# EAGLE board memcard (EAGLE 9.6.2)
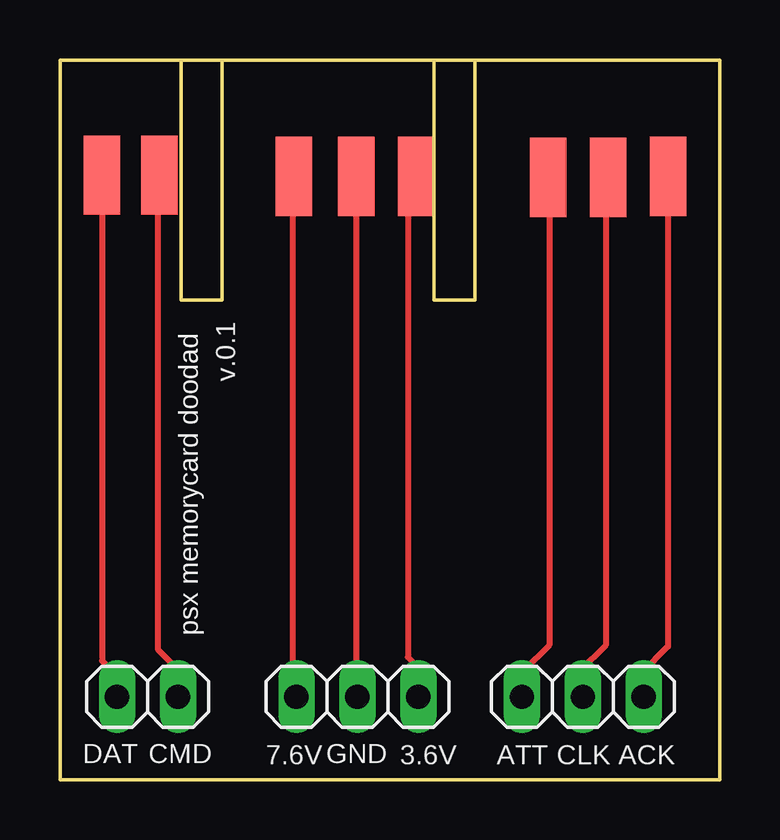
[diagram p0: board, top side]
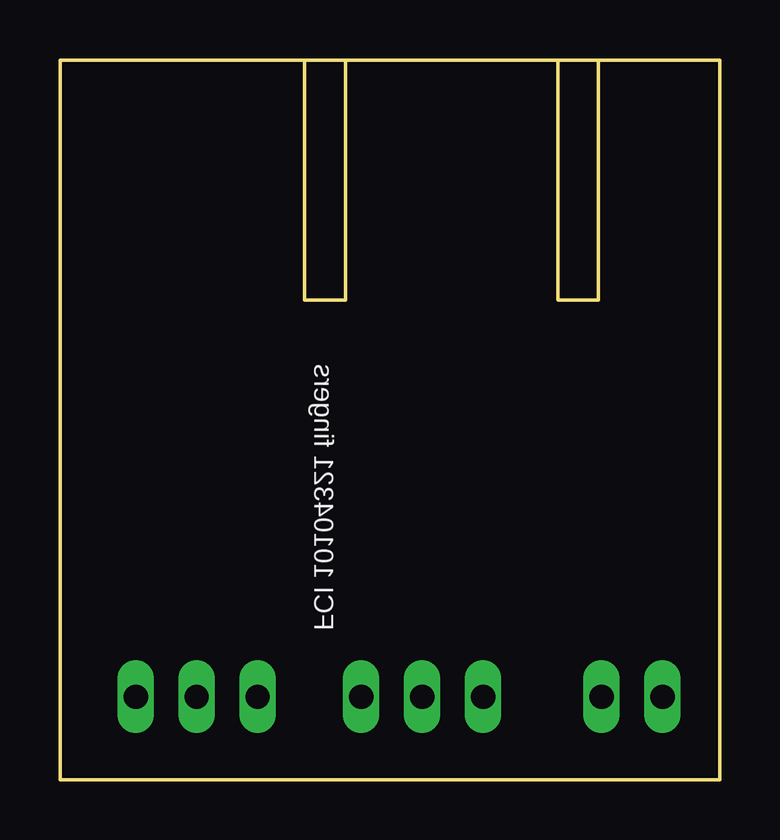
[diagram p1: board, bottom side, seen from below]

Size 27.5 x 30 mm. Coordinates in mm from the lower left corner, seen from the top.
Outline: 5.05,30 0,30 0,0 27.5,0 27.5,30 17.3,30
Outline: 5.05,30 6.75,30
Outline: 6.75,30 15.6,30
Outline: 15.6,30 17.3,30
Outline: 5.05,30 5.05,20 6.75,20 6.75,30
Outline: 15.6,30 15.6,20 17.3,20 17.3,30
Copper layers (1*16): Top 0.035559375mm / dielectric 1.6mm / Bottom 0.035559375mm
Design rules "oshpark-2layer": minimum track width 6mil, minimum drill 10mil, track to track 6mil, track to pad 6mil, pad to pad 6mil, via to via 6mil, smd to smd 6mil, copper to edge 15mil, drill to drill 6mil, minimum pad ring 5mil, minimum via ring 5mil, stop-mask expansion 2.5mil, vias tented up to drill 0mil, thermal gap 10mil

## Footprints (pad centres in the part's own frame; a part is rotated, then mirrored left to right if it is on the bottom)
1X02 = drill 1.016 long: 1 -1.27,0; 2 1.27,0
1X03 = drill 1.016 long: 1 -2.54,0; 2 0,0; 3 2.54,0
MEMCARDPAD = smd 1.524 x 3.302: 1 0,0

## Placement (x,y rotation side)
E$1  [1X02]  3.65,3.45 0 top
E$2  [1X03]  12.4,3.45 0 top
E$3  [1X03]  21.8,3.45 0 top
E$4  [MEMCARDPAD]  1.75,25.2 0 top
E$5  [MEMCARDPAD]  4.15,25.2 0 top
E$6  [MEMCARDPAD]  9.75,25.15 0 top
E$7  [MEMCARDPAD]  12.35,25.15 0 top
E$8  [MEMCARDPAD]  14.85,25.15 0 top
E$9  [MEMCARDPAD]  20.35,25.1 0 top
E$10  [MEMCARDPAD]  22.85,25.1 0 top
E$11  [MEMCARDPAD]  25.35,25.15 0 top

## Library data of the parts
E$1-E$3 = pinhead
E$4-E$11 = memcardpad

## Tracks (layer width: path | path; a pad name or v marks a point on that pad's centre or on a via)
S$1
  Top 0.254: 2.3,4.4 1.75,4.95 1.75,24.3
S$2
  Top 0.254: 4.1,24.25 4.1,5.4 4.95,4.55
S$3
  Top 0.254: 9.7,4.55 9.7,24.2 9.75,24.25
S$4
  Top 0.254: 12.35,24.05 12.35,4.5 12.45,4.4
S$5
  Top 0.254: 15.1,4.5 14.5,5.1 14.5,23.9 15,24.4
S$6
  Top 0.254: 19.35,4.55 20.4,5.6 20.4,24.35
S$7
  Top 0.254: 21.7,4.55 22.75,5.6 22.75,24.05 22.9,24.2
S$8
  Top 0.254: 24.25,4.45 25.35,5.55 25.35,24.15 25.05,24.45

## Text on the board
tPlace: v.0.1 | psx memorycard doodad | DAT | CMD | 7.6V | GND | 3.6V | ATT | CLK | ACK
bPlace: FCI 10104321 fingers